# Altium PCB SteeringWheel_v6.PcbDoc
Units mm, origin at the board's own origin, x right, y up, seen from the top; angles counter-clockwise.
Board outline 97.4 x 60.7 mm, 2 copper layers (Top Layer, Bottom Layer); 55 components, 59 nets, 195 pads, 37 vias.
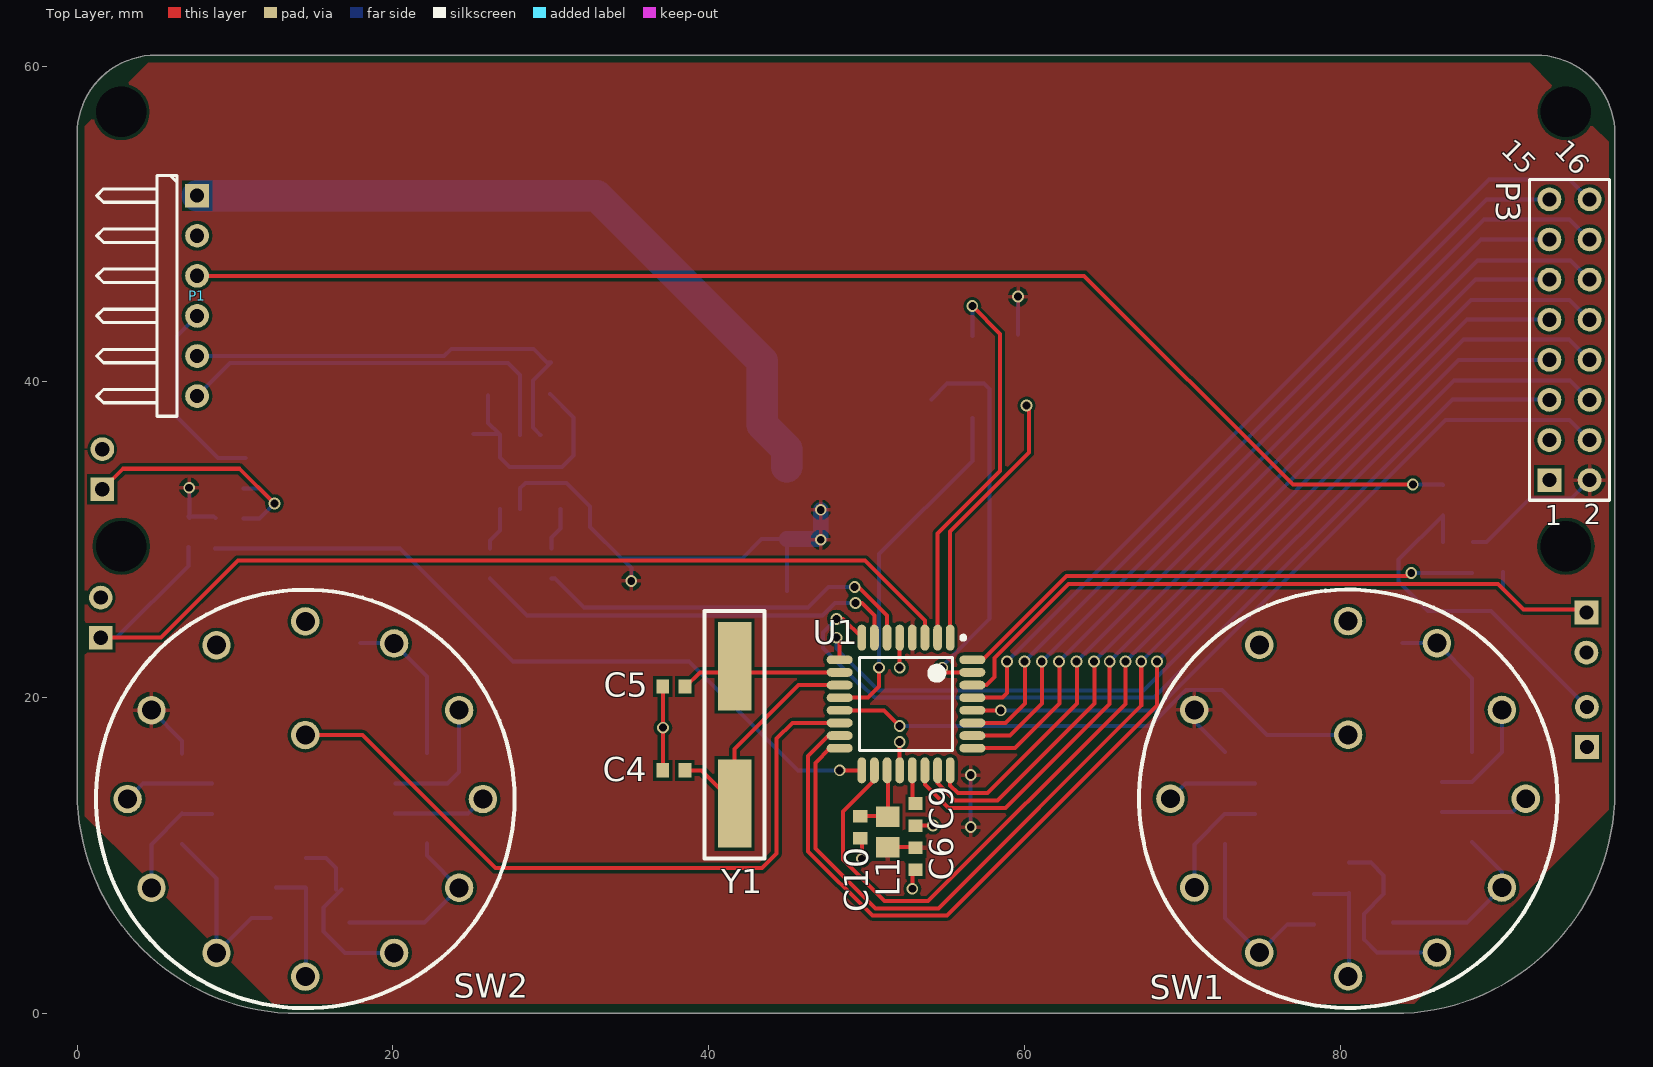
[diagram p0: Top Layer view]
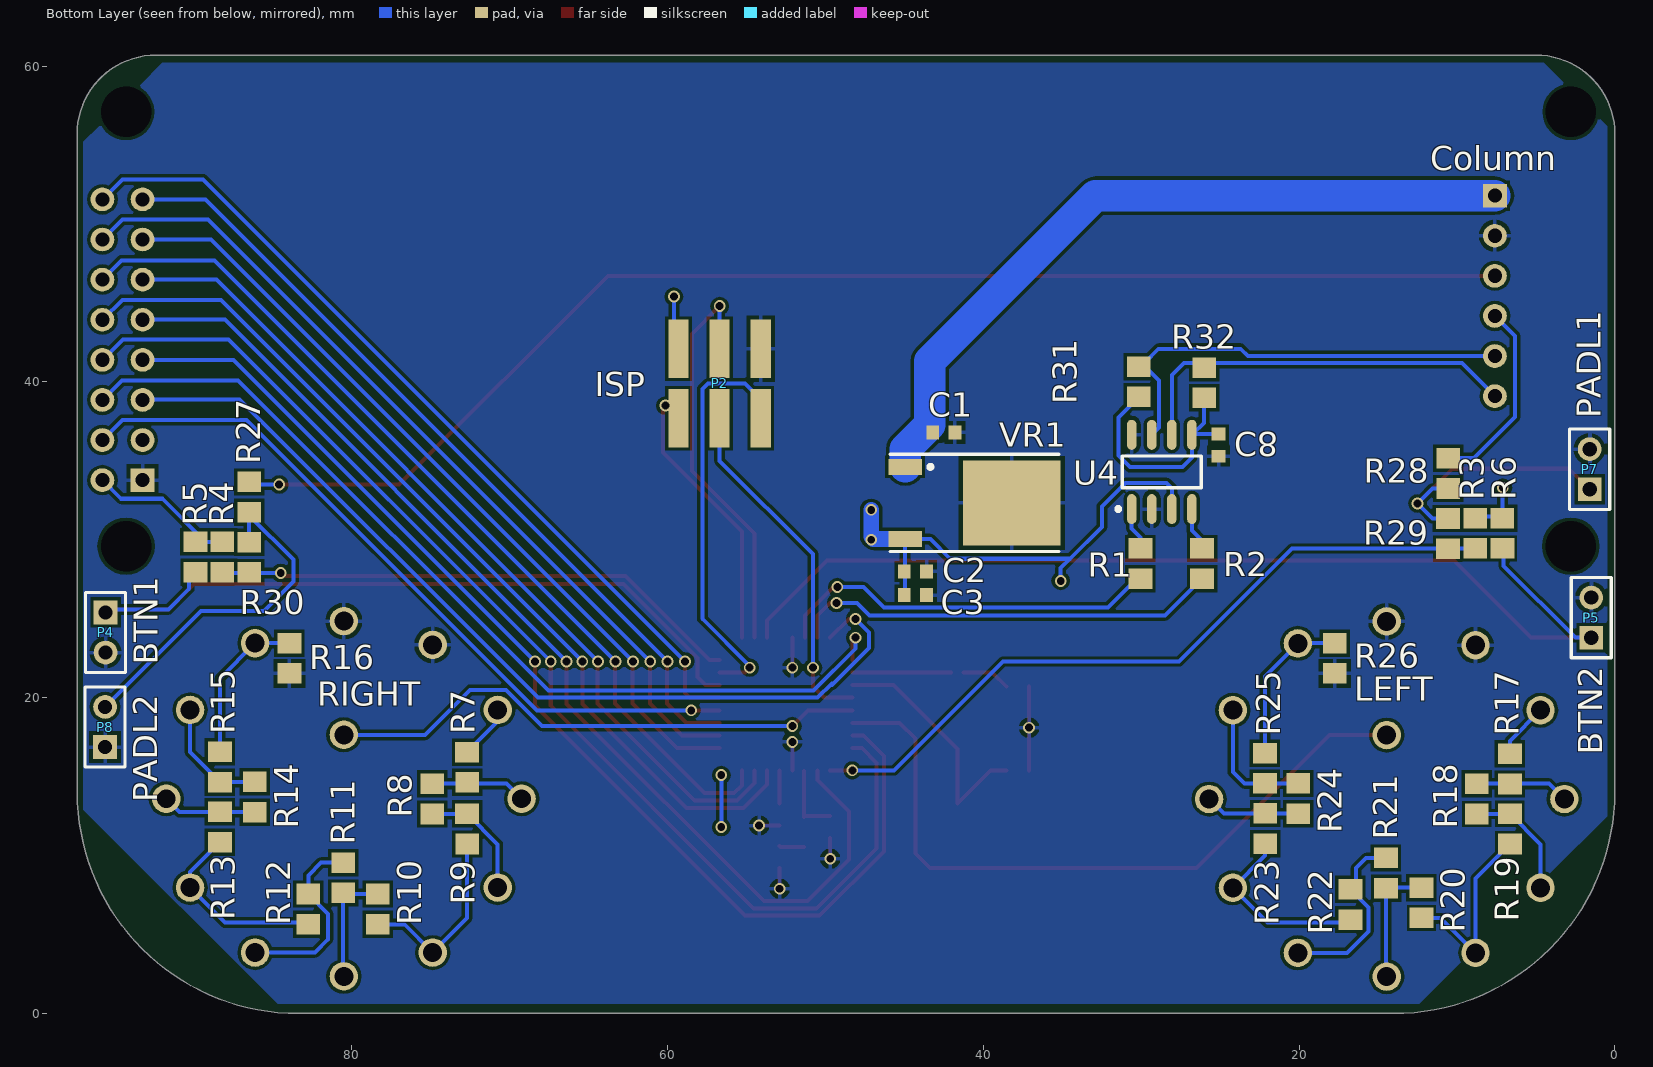
[diagram p1: Bottom Layer view, seen from below]

## Layer stack, top to bottom
Top Solder: solder mask 0.0102, Solder Resist, Dk 3.5
Top Layer: signal copper 0.0356
Dielectric1: dielectric 0.32, FR-4, Dk 4.8
Bottom Layer: signal copper 0.0356
Bottom Solder: solder mask 0.0102, Solder Resist, Dk 3.5

## Board outline
0,14 0,55.7 cw(c5,55.7) 5,60.7 92.4,60.7 cw(c92.4,55.7) 97.4,55.7 97.4,14 97.389,14 cw(c83.389,14) 83.389,0 14.011,0 cw(c14.011,14)

## Design rules (kind name [scope] priority, off if disabled: settings)
Clearance [All] p1: gap=0.2
PolygonConnect [All] p1: connectstyle=Relief reliefconductorwidth=0.254 reliefentries=4 polygonreliefangle="90 Angle" airgapwidth=0.254
RoutingVias [All] p1: holewidth=0.711 width=1.27 viastyle="Through Hole" minholewidth=0.711 minwidth=1.27 maxholewidth=0.711 maxwidth=1.27
SolderMaskExpansion [All] p1: expansion=0.13
Width [All] p1: maxlimit=6 minlimit=0.254 preferedwidth=0.254 minimp=50.000000 maximp=50.000000 favimp=50.000000
30 further rules are at their usual default settings.

## Components (designator, comment, footprint, x,y, rotation, side; value= is the part's Value field where it differs from the comment)
C1 "Cap" 1608[0603] 42.5,36.8 r180 bottom
C2 "Cap" 1608[0603] 44.3,28 r180 bottom
C3 "Cap" 1608[0603] 44.3,26.5 r180 bottom
C4 "Cap" 1608[0603] 37.8,15.4 r180 top
C5 "Cap" 1608[0603] 37.8,20.7 r180 top
C6 "Cap" 1608[0603] 53.1,9.8 r90 top
C8 "Cap" 1608[0603] 25.1,36 r270 bottom
C9 "Cap" 1608[0603] 53.1,12.6 r90 top
C10 "Cap" 1608[0603] 49.6,11.8 r90 top
L1 "Inductor" 2012[0805]_IND 52.1,13.1 r180 top
P1 "Column" HDR1X6H 7.6,51.8 r270 top
P2 "ISP" "ISP Header" 56.7,39.9 r0 bottom
P3 "OLED header" HDR2X8 71,45.7 r0 top
P4 "BTN1" HDR1X2 95.6,25.4 r270 bottom
P5 "BTN2" HDR1X2 1.5,23.8 r90 bottom
P7 "PADL1" HDR1X2 1.6,33.2 r90 bottom
P8 "PADL2" HDR1X2 95.627,16.873 r90 bottom
R1 "Res1" 2012[0805]_Res 29.2,30.2 r0 bottom
R2 "Res1" 2012[0805]_Res 25.3,30.2 r0 bottom
R3 "Res1" 2012[0805]_Res 9.7,28.7 r180 bottom
R4 "Res1" 2012[0805]_Res 89.05,27.2 r180 bottom
R5 "Res1" 2012[0805]_Res 90.75,27.2 r180 bottom
R6 "Res1" 2012[0805]_Res 7.975,28.7 r180 bottom
R7 "Res1" 2012[0805]_Res 71.85,17.3 r0 bottom
R8 "Res1" 2012[0805]_Res 74.05,15.3 r0 bottom
R9 "Res1" 2012[0805]_Res 71.85,13.4 r0 bottom
R10 "Res1" 2012[0805]_Res 79.2,4.9 r180 bottom
R11 "Res1" 2012[0805]_Res 79.7,10.3 r0 bottom
R12 "Res1" 2012[0805]_Res 83.6,4.9 r180 bottom
R13 "Res1" 2012[0805]_Res 89.2,10.1 r180 bottom
R14 "Res1" 2012[0805]_Res 87,12 r180 bottom
R15 "Res1" 2012[0805]_Res 89.2,13.9 r180 bottom
R16 "Res1" 2012[0805]_Res 83.1,24.2 r0 bottom
R17 "Res1" 2012[0805]_Res 5.8,17.2 r0 bottom
R18 "Res1" 2012[0805]_Res 7.9,15.3 r0 bottom
R19 "Res1" 2012[0805]_Res 5.8,13.4 r0 bottom
R20 "Res1" 2012[0805]_Res 13.1,5.3 r180 bottom
R21 "Res1" 2012[0805]_Res 13.65,10.6 r0 bottom
R22 "Res1" 2012[0805]_Res 17.6,5.2 r180 bottom
R23 "Res1" 2012[0805]_Res 23,10 r180 bottom
R24 "Res1" 2012[0805]_Res 20.9,11.9 r180 bottom
R25 "Res1" 2012[0805]_Res 23.013,13.824 r180 bottom
R26 "Res1" 2012[0805]_Res 16.9,24.2 r0 bottom
R27 "JMP" 2012[0805]_Res 87.35,31 r180 bottom
R28 "JMP" 2012[0805]_Res 11.4,32.5 r180 bottom
R29 "JMP" 2012[0805]_Res 9.725,32.1 r0 bottom
R30 "JMP" 2012[0805]_Res 85.65,30.6 r0 bottom
R31 "" 2012[0805]_Res 31,38.3 r180 bottom
R32 "" 2012[0805]_Res 25.154,41.654 r0 bottom
SW1 "SW_13" 13SW 80.5,13.6 r0 top
SW2 "SW_13" 13SW 14.452,13.582 r0 top
U1 "ATmega64M1-AU" 32A_N 52.5,19.6 r270 top
U4 "TJA1040" SO8_L 28.7,34.3 r90 bottom
VR1 "78M05" 78M05 41.577,32.335 r270 bottom
Y1 "XTAL" Crystal 42.7,10.5 r90 top

## Footprints (in the part's own frame and the unit in brackets; to place one, negate y for a bottom-side part, rotate by r counter-clockwise, add the part's x,y. Pads: shape width x height; smd on the part's side, far side on the other; paste and mask are expansions set on the pad)
13SW [mm] "For specific switch component"
  round 1.8 hole 1.2: 1(-5.622,9.743) 2(0.003,11.25) 3(5.628,9.853) 4(9.746,5.625) 5(11.253,0) 6(9.746,-5.625) 7(5.628,-9.743) 8(0.003,-11.25) 9(-5.622,-9.743) 10(-9.74,-5.625) 11(-11.253,0) 12(-9.74,5.625) 13(0.003,4.05)
  silkscreen extent -13.24,-13.25 13.25,13.25
32A_N [mm] "Thin QFP, 32-Leads, Body 7x7mm, Pitch 0.8mm, IPC Medium Density"
  oval 1.65x0.55 smd: 1(-4.2,2.8) 2(-4.2,2) 3(-4.2,1.2) 4(-4.2,0.4) 5(-4.2,-0.4) 6(-4.2,-1.2) 7(-4.2,-2) 8(-4.2,-2.8) 17(4.2,-2.8) 18(4.2,-2) 19(4.2,-1.2) 20(4.2,-0.4) 21(4.2,0.4) 22(4.2,1.2) 23(4.2,2) 24(4.2,2.8)
  oval 0.55x1.65 smd: 9(-2.8,-4.2) 10(-2,-4.2) 11(-1.2,-4.2) 12(-0.4,-4.2) 13(0.4,-4.2) 14(1.2,-4.2) 15(2,-4.2) 16(2.8,-4.2) 25(2.8,4.2) 26(2,4.2) 27(1.2,4.2) 28(0.4,4.2) 29(-0.4,4.2) 30(-1.2,4.2) 31(-2,4.2) 32(-2.8,4.2)
  silkscreen extent -4.32,-2.95 2.95,3.75, body extent -3.5,-3.5 3.5,3.5, height 1.2
78M05 [mm] "7M805 (D-Pak) Voltage Regulator"
  rect 1x2.1 smd: 1(-2.285,-3.375) 3(2.285,-3.375)
  rect 5.4x6.2 smd: 4(0,3.375)
  silkscreen extent -3.08,-4.32 3.09,6.38
1608[0603] [mm] "Chip Capacitor, Body 1.6x0.8mm, IPC High Density"
  rect 0.8x0.9 smd: 1(-0.7,0) 2(0.7,0)
  body extent -0.87,-0.48 0.87,0.48, height 1.3
2012[0805]_IND [mm]
  rect 1.5x1.3 smd: 1(0.75,0.65) 2(0.748,2.566)
  body extent 0.1,0.2 1.4,3, height 1.5
2012[0805]_Res [mm] "2012[0805] Resistor"
  rect 1.5x1.3 smd: 1(0.85,0.75) 2(0.848,2.666)
  body extent 0.2,0.3 1.5,3.1, height 0.5
Crystal [mm]
  rect 5.6x2.1 smd: 1(2.8,1.05) 2(11.5,1.05)
  silkscreen extent -0.7,-0.85 15,2.95, body extent 1.28,-0.85 13.23,2.95, height 4
HDR1X2 [mm] "Connector; Header; 2 Position"
  rect 1.5x1.5 hole 0.9: 1(0,0)
  round 1.5 hole 0.9: 2(2.54,0)
  silkscreen extent -1.27,-1.27 3.81,1.27
HDR1X6H [mm] "Connector; Header; 6 Position; Right Angle"
  rect 1.5x1.5 hole 0.9: 1(0,0)
  round 1.5 hole 0.9: 2(2.54,0) 3(5.08,0) 4(7.62,0) 5(10.16,0) 6(12.7,0)
  silkscreen extent -1.27,-6.35 13.97,-1.27
HDR2X8 [mm] "Connector; Header; 8x2 Position"
  rect 1.5x1.5 hole 0.9: 1(22.255,-11.92)
  round 1.5 hole 0.9: 2(24.795,-11.92) 3(22.255,-9.38) 4(24.795,-9.38) 5(22.255,-6.84) 6(24.795,-6.84) 7(22.255,-4.3) 8(24.795,-4.3) 9(22.255,-1.76) 10(24.795,-1.76) 11(22.255,0.78) 12(24.795,0.78) 13(22.255,3.32) 14(24.795,3.32) 15(22.255,5.86) 16(24.795,5.86)
  silkscreen extent 20.98,-13.19 26.06,7.13
"ISP Header" [mm]
  rect 1.27x3.68 smd: 1(-2.6,2.2) 2(0,2.2) 3(2.6,2.2) 4(-2.6,-2.2) 5(0,-2.2) 6(2.6,-2.2)
  body extent -3.75,-2.5 3.75,2.5, height 10
SO8_L [mm] "SOIC, 8-Leads, Body 4.9x3.9mm, Pitch 1.27mm, IPC High Density"
  oval 1.9x0.6 smd: 1(-2.35,1.905) 2(-2.35,0.635) 3(-2.35,-0.635) 4(-2.35,-1.905) 5(2.35,-1.905) 6(2.35,-0.635) 7(2.35,0.635) 8(2.35,1.905)
  silkscreen extent -2.47,-2.5 1,2.88, body extent -2,-2.5 2,2.5, height 1.75

## Part data
C1 C2 C3 C4 C5 C6 C8 C9 C10: "Capacitor"
P1: library part "Header 6H", "Header, 6-Pin, Right Angle"
P2: library part "Header 3X2", "Header, 3-Pin, Dual row"
P3: library part "Header 8X2H", "2 row header for OLED screen"
P4 P5 P7 P8: library part "Header 2", "Header, 2-Pin"
R1 R2 R3 R4 R5 R6 R7 R8 R9 R10 R11 R12 R13 R14 R15 R16 R17 R18 R19 R20 R21 R22 R23 R24 R25 R26: "Resistor"
R27 R28 R29 R30 R31 R32: library part Res1, "Resistor"
SW1 SW2: "12 Way Switch"
U1: "8-bit AVR Microcontroller, 64KB Flash, 2KB EEPROM, 4KB SRAM, Industrial Grade (-40° to +85°C), 32-Pin TQFP"
U4: "High speed CAN transceiver"
VR1: "Positive Voltage Regulator (D-PAK)"
Y1: "Crystal Oscillator"

## Free pads (board coordinates)
  round 3 hole 3.2 unplated: ""(2.8,29.6) ""(2.8,57.1) ""(94.3,29.6) ""(94.3,57.1)

## Via types
v1: diameter 0.75, hole 0.5, Top Layer to Bottom Layer, 37 vias

## Nets (pads, with @x,y where several pads share a name; then routed paths per layer and width w, separated by ;. In a path a pad name is that pad's centre, name@x,y a point inside that pad or via, vN(x,y) a via of type N, cw(c..) or ccw(c..) an arc to the next point about the centre after c; other vN are vias at no path point)
AREF: C9.2 U1.21 | length 2.1
  Top Layer w0.254: C9.2@52.9,13.3 U1.21
AVCC: C10.2 L1.1 U1.19 | length 4.6
  Top Layer w0.254: C10.2@49.7,12.5 51.3,12.5 L1.1 U1.19@51.35,15.35
BTN1: P4.1 R5.1 U1.30 | length 49.8
  Top Layer w0.254: U1.30 57.6,20.8 58.1,21.3 58.1,22.5 62.798,27.198 90.002,27.198 91.6,25.6 P4.1@95.6,25.6
  Bottom Layer w0.254: R5.1@90.3,27.95 90.3,26.9 91.6,25.6 P4.1@95.575,25.6
BTN2: P5.1 R6.1 U1.3 | length 65.5
  Top Layer w0.254: P5.1 5.3,23.8 10.2,28.7 49.9,28.7 53.7,24.9 U1.3
  Bottom Layer w0.254: P5.1 2.5,23.8 7.05,28.35 R6.1@7.05,29.55
CANH: P1.5 R31.2 U4.7 | length 28.2
  Bottom Layer w0.254: P1.5@7.614,41.654 23.254,41.654 23.7,42.1 28.9,42.1 29.768,41.232 30.018,41.232 28.873,40.087 28.873,37.112 U4.7
CANL: P1.6 R32.1 U4.6 | length 25.4
  Bottom Layer w0.254: P1.6 9.7,41.2 27.3,41.2 28.065,40.435 U4.6
GLV: C1.1 P1.1 VR1.1 | length 47.5
  Bottom Layer w2: P1.1 32.9,51.8 43.4,41.3 43.4,37.3 44.952,35.748 VR1.1
GND: C1.2 C2.2 C3.2 C4.2 C5.2 C6.1 C8.2 C9.1 C10.1 P1.2 P2.4 P3.1 P4.2 P5.2 P7.2 P8.1 R16.2 R26.2 SW1.1 SW1.2 SW2.1 SW2.2 U1.5 U1.20 U4.2 U4.8 VR1.4 | length 12.9
  Top Layer w0.254: C4.2 v1(37.1,18.1) C5.2 ; v1(49.7,9.8) C10.1@49.7,11.1 ; U1.20 v1(52.1,17.2) ; v1(52.1,21.9) U1.5 ; v1(52.9,7.9) C6.1@52.9,9.2 ; C9.1@52.9,11.9 v1(54.2,11.9)
MISO: P2.3 U1.1 | length 16.8
  Top Layer w0.254: U1.1 55.3,30.52 60.3,35.52 60.3,38.335 v1(60.135,38.5)
MOSI: P2.5 U1.2 | length 25.3
  Top Layer w0.254: U1.2 54.5,30.4 58.465,34.365 58.465,43.035 v1(56.7,44.8)
  Bottom Layer w0.254: P2.5@56.7,42.9 v1(56.7,44.8)
OLED_C\S\: P3.16 U1.29 | length 54.4
  Top Layer w0.254: U1.29 58.6,20 58.9,20.3 v1(58.9,22.3)
  Bottom Layer w0.254: v1(58.9,22.3) 89.43,52.83 94.525,52.83 P3.16
OLED_D0: P3.4 U1.28 | length 47.2
  Top Layer w0.254: U1.28 v1(58.5,19.2)
  Bottom Layer w0.254: v1(58.5,19.2) 68.272,19.2 86.672,37.6 94.515,37.6 P3.4
OLED_D1: P3.5 U1.8 | length 59.6
  Top Layer w0.254: v1(48.1,24.986) 48.514,24.986 U1.8
  Bottom Layer w0.254: v1(48.1,24.986) 47.25,24.136 47.25,23.15 49.598,20.802 49.598,20.902 50.5,20 68.2,20 87.1,38.9 P3.5@93.255,38.9
OLED_D2: P3.6 U1.9 | length 59.6
  Top Layer w0.254: v1(48.1,23.8) 48.3,23.6 U1.9
  Bottom Layer w0.254: v1(48.1,23.8) 48.1,23.1 50.746,20.454 67.554,20.454 87.2,40.1 94.555,40.1 P3.6
OLED_D3: P3.7 U1.15 | length 73.4
  Top Layer w0.254: U1.15 47.6,17.6 46.3,16.3 46.3,10.267 50.367,6.2 55.1,6.2 68.4,19.5 v1(68.4,22.3)
  Bottom Layer w0.254: v1(68.4,22.3) 87.5,41.4 P3.7
OLED_D4: P3.8 U1.16 | length 75.1
  Top Layer w0.254: U1.16 47.7,16.8 46.754,15.854 46.754,10.455 50.555,6.654 54.554,6.654 67.4,19.5 v1(67.4,22.3)
  Bottom Layer w0.254: v1(67.4,22.3) 87.8,42.7 94.495,42.7 P3.8
OLED_D5: P3.9 U1.18 | length 69.2
  Top Layer w0.254: U1.18 50.5,14.799 48.5,12.799 48.5,9.742 51.134,7.108 53.908,7.108 66.4,19.6 v1(66.4,22.3)
  Bottom Layer w0.254: v1(66.4,22.3) 88.04,43.94 P3.9
OLED_D6: P3.10 U1.22 | length 59.1
  Top Layer w0.254: U1.22 53.7,14.5 55.2,13 58.8,13 65.4,19.6 v1(65.4,22.3)
  Bottom Layer w0.254: v1(65.4,22.3) 88.3,45.2 94.535,45.2 P3.10
OLED_D7: P3.11 U1.23 | length 55.4
  Top Layer w0.254: U1.23 54.5,14.6 55.6,13.5 58.3,13.5 64.424,19.624 v1@64.424,22.3
  Bottom Layer w0.254: v1@64.4,22.4 v1(64.4,22.3) 88.58,46.48 P3.11
OLED_D\C\: P3.14 U1.26 | length 54.8
  Top Layer w0.254: U1.26 59.1,17.6 61.124,19.624 v1@61.124,22.3
  Bottom Layer w0.254: v1(61.1,22.3) 89.1,50.3 94.515,50.3 P3.14
OLED_R\D\: P3.12 U1.24 | length 57.7
  Top Layer w0.254: U1.24 55.3,14.442 55.788,13.954 57.654,13.954 63.324,19.624 v1@63.324,22.3
  Bottom Layer w0.254: v1(63.3,22.3) 88.7,47.7 94.575,47.7 P3.12
OLED_R\E\S\E\T\: P3.15 U1.27 | length 51.9
  Top Layer w0.254: U1.27 58.8,18.4 60.024,19.624 v1@60.024,22.3
  Bottom Layer w0.254: v1(60,22.3) 89.26,51.56 P3.15
OLED_W\R\: P3.13 U1.25 | length 51.5
  Top Layer w0.254: U1.25 59.4,16.8 62.224,19.624 v1@62.224,22.3
  Bottom Layer w0.254: v1(62.2,22.3) 88.92,49.02 P3.13
PADL1_1: R3.1 R29.2 U1.17 | length 46.8
  Top Layer w0.254: v1(48.3,15.4) U1.17
  Bottom Layer w0.254: R3.1@8.75,29.45 20.45,29.45 27.6,22.3 38.75,22.3 45.65,15.4 v1(48.3,15.4)
PADL1_2: P7.1 R28.1 R29.1 | length 17
  Top Layer w0.254: P7.1 2.9,34.5 10.3,34.5 v1(12.5,32.3)
  Bottom Layer w0.254: R29.1@10.55,31.35 11.55,31.35 v1(12.5,32.3) 11.55,33.25 R28.1
PADL1_3: P1.4 R28.2 | length 12.3
  Bottom Layer w0.254: P1.4 6.33,42.91 6.33,37.77 8.934,35.166 R28.2@10.652,35.166
PADL2_1: R4.1 R30.2 U1.32 | length 33.9
  Top Layer w0.254: U1.32 57.358,22.4 62.658,27.7 84.3,27.7 v1(84.5,27.9)
  Bottom Layer w0.254: v1(84.5,27.9) R4.1@88.35,27.9
PADL2_2: P8.2 R27.1 R30.1 | length 22.3
  Bottom Layer w0.254: R30.1 86.5,31.55 83.7,28.75 83.7,27.372 85.572,25.5 89.54,25.5 P8.2
PADL2_3: P1.3 R27.2 | length 84.4
  Top Layer w0.254: P1.3 63.78,46.72 77,33.5 v1(84.6,33.5)
  Bottom Layer w0.254: v1(84.6,33.5) 86.468,33.5 R27.2@86.502,33.466
RESET: P2.1 U1.31 | length 25.1
  Top Layer w0.254: v1(54.8,21.9) 55.1,21.6 U1.31
  Bottom Layer w0.254: P2.1@54.1,38.9 55.1,39.9 57.438,39.9 57.8,39.537 57.8,25 v1@54.8,22
RXCAN1: R2.2 U1.7 | length 27.4
  Top Layer w0.254: v1(49.3,26) 49.7,26 50.5,25.2 U1.7
  Bottom Layer w0.254: R2.2 28.482,25.2 47.2,25.2 48,26 v1(49.3,26)
RXCAN2: R2.1 U4.4 | length 2.8
  Bottom Layer w0.254: R2.1 26.15,29.95 26.795,30.595 U4.4
SCK: P2.2 U1.12 | length 22.2
  Top Layer w0.254: U1.12 50.1,20 50.8,20.7 v1@50.8,22
  Bottom Layer w0.254: v1@50.8,22 50.8,29.1 56.7,35 P2.2
  other v1: 50.8,21.9
SW1_3: R15.2 R16.1 SW1.3 | length 10
  Bottom Layer w0.254: R16.1 SW1.3@86.125,23.45 ; SW1.3 88.352,21.229 R15.2
SW1_4: R14.2 R15.1 SW1.4 | length 7.2
  Bottom Layer w0.254: R14.2@86.452,14.666 R15.1@88.334,14.666 ; R15.1 90.246,16.546 SW1.4
SW1_5: R13.2 R14.1 SW1.5 | length 5.7
  Bottom Layer w0.254: R14.1@86.45,12.75 90.903,12.75 SW1.5
SW1_6: R12.1 R13.1 SW1.6 | length 11.5
  Bottom Layer w0.254: R12.1@83.35,5.75 88.021,5.75 SW1.6 90.246,8.954 R13.1
SW1_7: R11.1 R12.2 SW1.7 | length 12.1
  Bottom Layer w0.254: R11.1 81.95,9.55 82.752,8.748 R12.2 81.5,6.314 81.5,4.7 82.343,3.857 SW1.7
SW1_8: R10.2 R11.2 SW1.8 | length 7.5
  Bottom Layer w0.254: R10.2 80.48,7.566 R11.2 SW1.8@80.548,2.35
SW1_9: R9.2 R10.1 SW1.9 | length 12
  Bottom Layer w0.254: R9.2 72.698,6.037 SW1.9 76.671,5.65 R10.1
SW1_10: R8.2 R9.1 SW1.10 | length 7.4
  Bottom Layer w0.254: SW1.10 70.76,10.71 72.684,12.634 R8.2@74.598,12.634
SW1_11: R7.2 R8.1 SW1.11 | length 5.7
  Bottom Layer w0.254: SW1.11 70.197,14.55 R8.1@74.6,14.55
SW1_INPUT: SW1.13 U1.13 | length 34.8
  Top Layer w0.254: U1.13 48.302,19.202 51.098,19.202 v1(52.1,18.2)
  Bottom Layer w0.254: v1(52.1,18.2) 67.942,18.2 70.242,20.5 72.5,20.5 75.35,17.65 SW1.13
SW2_3: R25.2 R26.1 SW2.3 | length 9.9
  Bottom Layer w0.254: R26.1@17.95,23.45 SW2.3@20.065,23.45 ; SW2.3 22.165,21.35 R25.2
SW2_4: R24.2 R25.1 SW2.4 | length 8.3
  Bottom Layer w0.254: R24.2@20.152,14.566 23.466,14.566 24.198,15.298 SW2.4
SW2_5: R23.2 R24.1 SW2.5 | length 5.9
  Bottom Layer w0.254: R24.1@20.15,12.65 24.773,12.65 SW2.5
SW2_6: R22.1 R23.1 SW2.6 | length 11.5
  Bottom Layer w0.254: R22.1@17.25,5.75 21.991,5.75 SW2.6 22.15,10.005 R23.1
SW2_7: R21.1 R22.2 SW2.7 | length 11.7
  Bottom Layer w0.254: R21.1 15.75,9.85 16.402,9.198 R22.2@16.402,7.866 ; R22.2 15.6,6.714 15.6,5.2 16.961,3.839 SW2.7
SW2_8: R20.2 R21.2 SW2.8 | length 7.5
  Bottom Layer w0.254: R20.2@12.602,7.966 R21.2@14.466,7.966 ; SW2.8@14.498,2.332 R21.2
SW2_9: R19.2 R20.1 SW2.9 | length 12.1
  Bottom Layer w0.254: R19.2 8.83,8.552 SW2.9 11.041,6.05 R20.1
SW2_10: R18.2 R19.1 SW2.10 | length 7.4
  Bottom Layer w0.254: SW2.10 4.712,10.712 R19.1 ; R19.1@6.666,12.634 R18.2@8.548,12.634
SW2_11: R17.2 R18.1 SW2.11 | length 5.8
  Bottom Layer w0.254: SW2.11 4.167,14.55 R18.1@8.55,14.55
SW2_INPUT: SW2.13 U1.14 | length 45.4
  Top Layer w0.254: SW2.13 18.068,17.632 26.5,9.2 43.372,9.2 44.3,10.128 44.3,17.4 45.3,18.4 U1.14
TJA1040_SPLIT: C8.1 R31.1 R32.2 U4.5 | length 15.6
  Bottom Layer w0.254: C8.1 U4.5@26.745,36.7 ; R32.2@26.034,39.152 26.034,37.411 U4.5@26.745,36.7 ; R31.1@29.95,39.25 31.45,37.75 31.45,35.35 30.7,34.6 27.4,34.6 26.795,35.205 U4.5 U4.5@26.745,36.7
TXCAN1: R1.2 U1.6 | length 24.6
  Top Layer w0.254: v1@49.35,27 49.5,27 51.3,25.2 U1.6
  Bottom Layer w0.254: R1.2 30.266,27.534 32.1,25.7 46.3,25.7 47.6,27 v1(49.25,27)
TXCAN2: R1.1 U4.1 | length 2.7
  Bottom Layer w0.254: R1.1 30.05,30.15 30.605,30.705 U4.1
VCC: C2.1 C3.1 C6.2 L1.2 P2.6 P3.2 R3.2 R4.2 R5.2 R6.2 R7.1 R17.1 SW1.12 SW2.12 U1.4 U4.3 VR1.3 | length 57.5
  Top Layer w0.254: L1.2 52.834,10.534 C6.2@52.9,10.6
  Bottom Layer w0.254: SW2.12 6.65,17.269 R17.1 ; R6.2@7.052,31.466 R6.2@7.124,31.466 ; R6.2@7.124,31.366 R6.2@7.124,31.466 ; v1@7.124,33.324 R6.2@7.124,31.466 ; R3.2@8.752,31.366 8.652,31.466 R6.2@7.124,31.466 ; U4.3 28.065,33.265 28.4,33.6 31,33.6 32.5,32.1 32.5,30.8 34.5,28.8 ; v1(35.1,27.4) 35.1,28.2 34.5,28.8 ; C3.1@44.952,26.748 VR1.3 43.35,30.05 42.1,28.8 34.5,28.8 ; v1(56.6,11.8) v1(56.6,15.1) ; P2.6@59.6,43 v1(59.6,45.4) ; SW1.12 70.76,18.49 R7.1 ; R4.2@88.402,29.866 89.266,29.866 92,32.6 94.615,32.6 P3.2
  Bottom Layer w1: VR1.3 46.95,30.05 47.1,30.2 v1(47.1,31.9)
  other v1: 47.1,30 7.1,33.3
XTAL1: C5.1 U1.10 Y1.2 | length 9.3
  Top Layer w0.254: C5.1@38.55,20.7 39.45,21.6 Y1.2@41.25,21.6 ; Y1.2@42.05,21.6 U1.10
XTAL2: C4.1 U1.11 Y1.1 | length 15.7
  Top Layer w0.254: C4.1@38.55,15.4 39.55,15.4 Y1.1 41.65,16.75 45.7,20.8 U1.11
pads on no net: P3.3

## Polygon pours and split planes (outlines as drawn)
VCC on Top Layer "Shine" (solid, remove dead copper, pour order 4): 4.5,60.2 92,60.2 97,55.2 97,12.9 84.7,0.6 12.4,0.6 0.5,12.5 0.5,56.2
GND on Bottom Layer "Shine" (solid, remove dead copper, pour order 6): 0.5,56.2 4.5,60.2 92,60.2 97,55.2 97,12.9 84.7,0.6 12.4,0.6 0.5,12.5

## Silkscreen, mask and mechanical layers (free items; w line width, h text height)
Bottom Overlay:
  text "LEFT" at 16.5,19.8 h1.52
  text "RIGHT" at 82.2,19.5 h1.52
Mechanical 1:
  lines w0.254: 0,14 0,55.7 cw(c5,55.7) 5,60.7 92.4,60.7 cw(c92.4,55.7) 97.4,55.7 97.4,14 ; 14.011,0 83.389,0
Mechanical 13:
  lines w0.254: 0.011,14 ccw(c14.011,14) 14.011,0 ; 83.389,0 ccw(c83.389,14) 97.389,14

## Text inside footprints (layer, text, board x,y; h text height)
P3: Top Overlay "2" at 95.415,30.995 h1.27; Top Overlay "1" at 92.96,30.92 h1.27; Top Overlay "15" at 90.1,54.6 h1.27 r315; Top Overlay "16" at 93.5,54.6 h1.27 r313.26